# Altium PCB ExchangeDisplay2.PcbDoc (part 2 of 3)
Units mil, origin at the board's own origin, x right, y up, seen from the top; angles counter-clockwise.
Board outline 13550 x 7110 mil, 2 copper layers (Top Layer, Bottom Layer); 256 components, 104 nets, 668 pads, 97 vias.
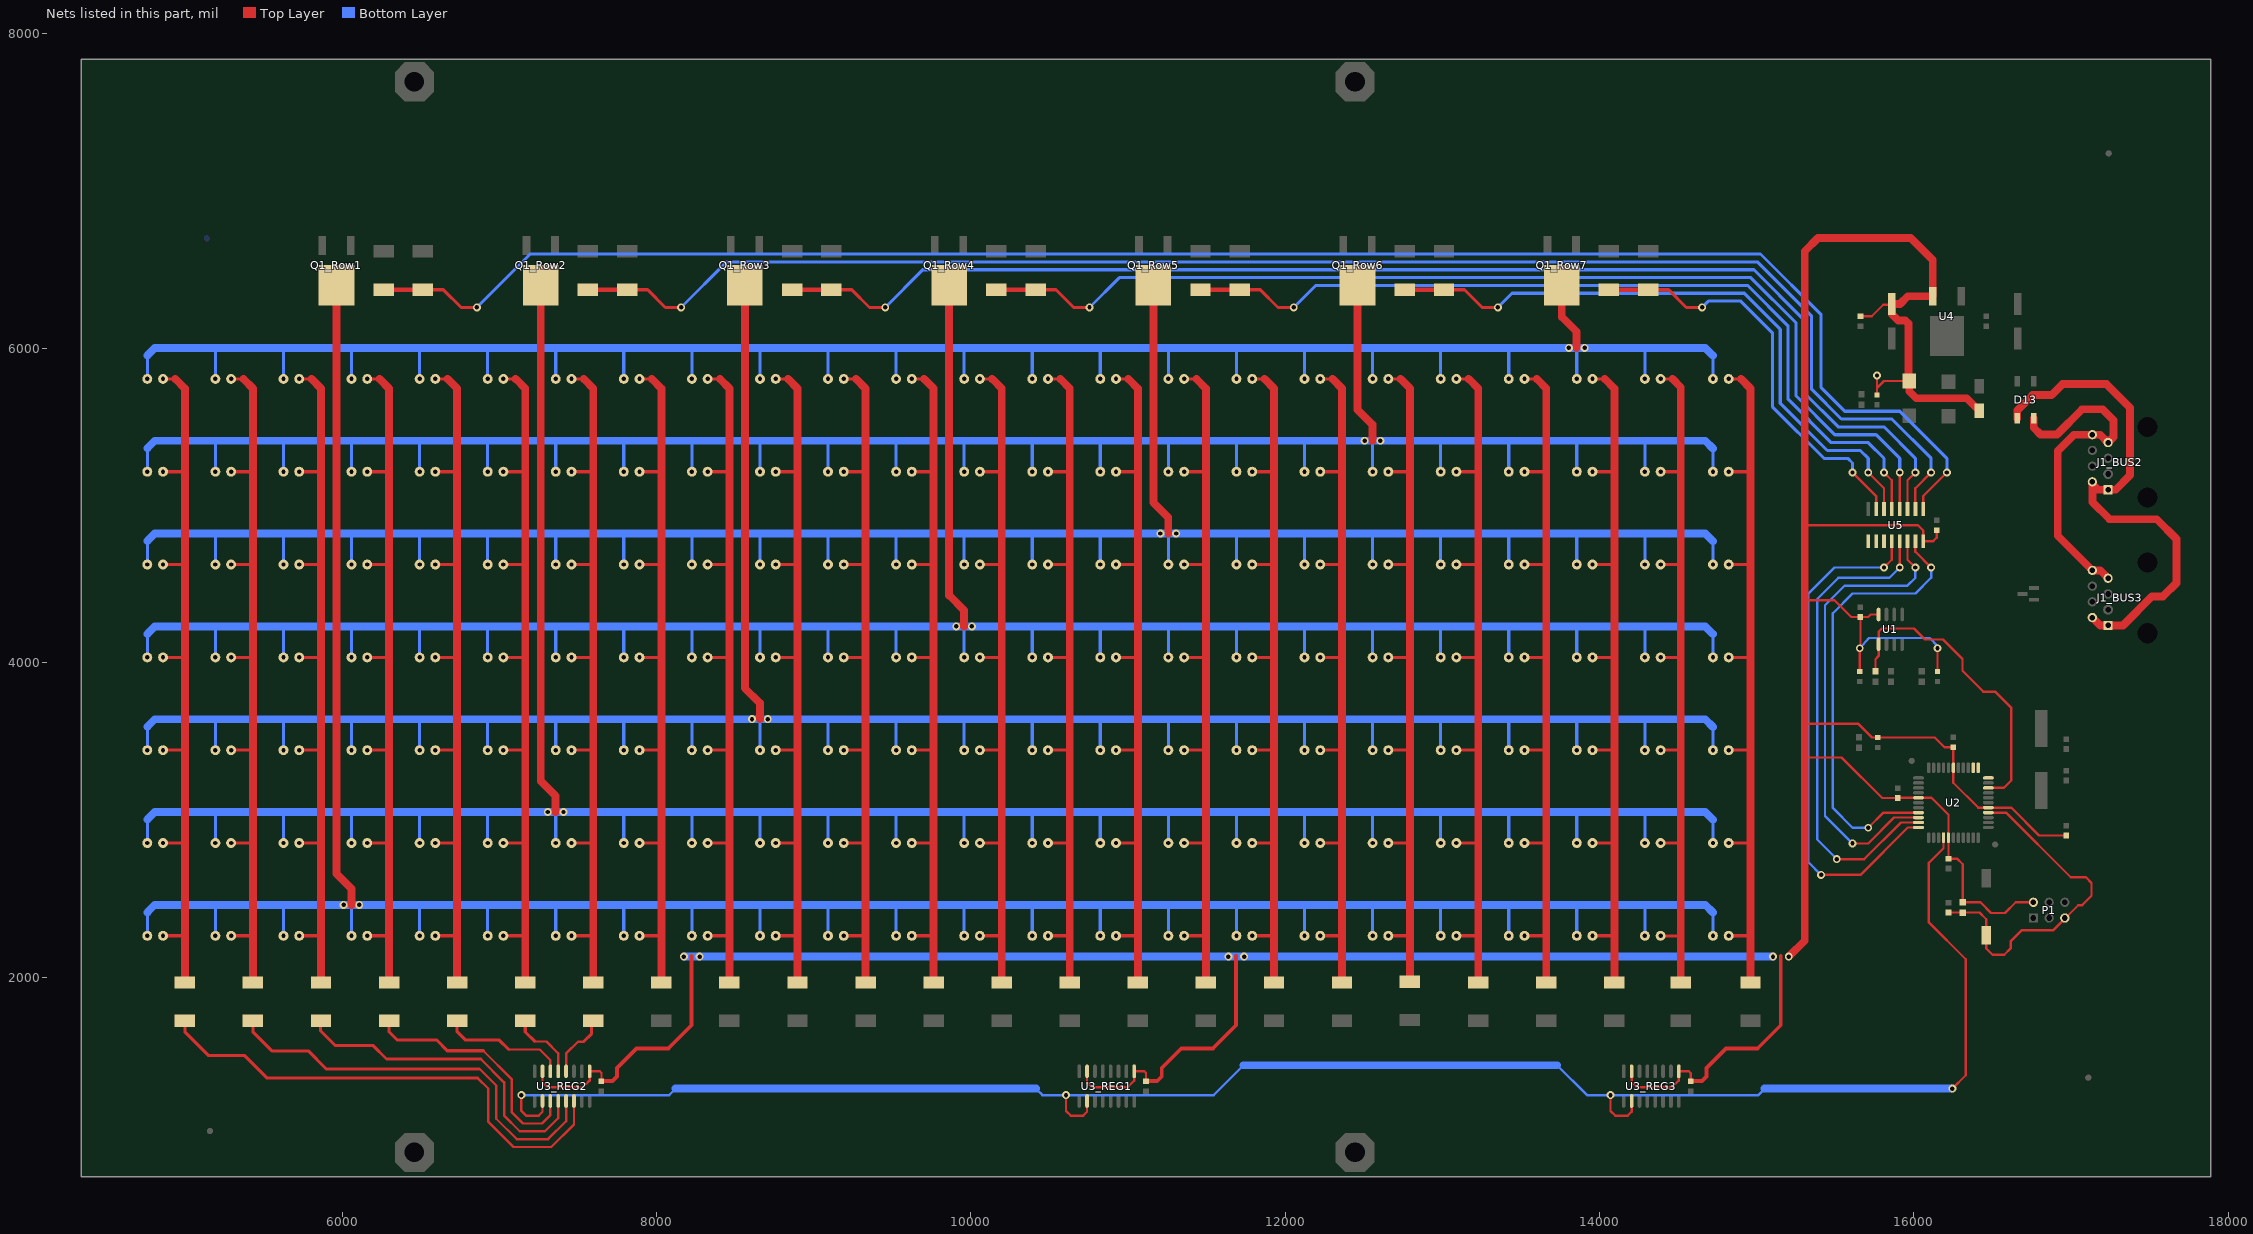
[diagram p2: the nets of this part, all layers, seen from the top]

## Via types
v1: diameter 50, hole 28, Top Layer to Bottom Layer, 96 vias
v2: diameter 50, hole 27.99, Top Layer to Bottom Layer, 1 vias

## Nets (pads, with @x,y where several pads share a name; then routed paths per layer and width w, separated by ;. In a path a pad name is that pad's centre, name@x,y a point inside that pad or via, vN(x,y) a via of type N, cw(c..) or ccw(c..) an arc to the next point about the centre after c; other vN are vias at no path point) (continued)
NetR26_2: R26.2 U3_REG2.4 | length 408.5
  Top Layer w15: U3_REG2.4@7425.47,1400.47 7425.47,1512.72 7501.34,1588.58 7538.19,1588.58
  Top Layer w20: 7538.19,1589.92 7588.27,1640 R26.2@7588.27,1721.34
NetR27_2: R27.2 U3_REG2.5 | length 451
  Top Layer w15: 7225.39,1589.45 7300.47,1589.45 7375.47,1514.45 U3_REG2.5@7375.47,1400.47
  Top Layer w20: R27.2@7165.35,1721.42 7165.35,1650.48 7225.39,1590.44
NetR28_2: R28.2 U3_REG2.6 | length 808.1
  Top Layer w15: 7061.34,1538.58 7257.87,1538.58 7325.47,1470.99 U3_REG2.6@7325.47,1400.47
  Top Layer w20: R28.2@6732.28,1721.42 6732.28,1651.03 6783.31,1600 ; 6783.31,1598.58 7001.34,1598.58 7061.34,1538.58
NetR29_2: R29.2 U3_REG2.11 | length 1572.1
  Top Layer w15: 6898.84,1531.08 7078.84,1351.08 7078.84,1141.08 7151.34,1068.58 7271.34,1068.58 7325.47,1122.72 U3_REG2.11@7325.47,1211.5
  Top Layer w20: R29.2@6299.21,1721.42 6299.21,1651.03 6350.24,1600 6600.79,1600 6669.7,1531.08 6898.84,1531.08
NetR30_2: R30.2 U3_REG2.12 | length 2113.4
  Top Layer w15: 6882.51,1478.58 7031.34,1329.75 7031.34,1118.58 7131.34,1018.58 7291.34,1018.58 7375.47,1102.72 U3_REG2.12@7375.47,1211.5
  Top Layer w20: R30.2@5864.01,1726.93 5864.01,1656.54 5955.04,1565.51 6196.14,1565.51 6283.07,1478.58 6882.51,1478.58
NetR31_2: R31.2 U3_REG2.13 | length 2644.6
  Top Layer w15: 6875.1,1415.99 6981.34,1309.75 6981.34,1098.58 7111.34,968.58 7311.34,968.58 7425.47,1082.72 U3_REG2.13@7425.47,1211.5
  Top Layer w20: R31.2@5433.07,1721.42 5433.07,1651.03 5554.09,1530 5785.75,1530 5898.35,1417.4 ; 5898.35,1415.99 6875.1,1415.99
NetR32_2: R32.2 U3_REG2.14 | length 3180.9
  Top Layer w15: 6862.59,1358.58 6931.34,1289.83 6931.34,1078.58 7091.34,918.58 7331.34,918.58 7475.47,1062.72 U3_REG2.14@7475.47,1211.5
  Top Layer w20: R32.2@5000,1721.42 5000,1651.03 5151.02,1500 5381.02,1500 5521.02,1360 ; 5521.02,1358.58 6862.59,1358.58
NetU5_9: U5.9
NetU5_10: U5.10
NetU5_11: U5.11
OUT_Row1: D5_Row1.A D6_Row1.A D7_Row1.A D8_Row1.A D9_Row1.A D10_Row1.A D11_Row1.A D17_Row1.A D18_Row1.A D19_Row1.A D20_Row1.A D21_Row1.A D22_Row1.A D23_Row1.A D24_Row1.A D25_Row1.A D26_Row1.A D27_Row1.A D28_Row1.A D29_Row1.A D30_Row1.A D31_Row1.A D32_Row1.A D33_Row1.A Q1_Row1.2 | length 18509.2
  Top Layer w50: Q1_Row1.2@5964.72,6300.51 5964.72,2656.69 6059.72,2561.69 6059.72,2459.06
  Bottom Layer w20: D33_Row1.A@4761.37,2262.21 4761.37,2411.37 ; D32_Row1.A@5194.44,2262.21 5194.44,2459.06 ; D31_Row1.A@5627.51,2262.21 5627.51,2459.06 ; D30_Row1.A@6060.58,2262.21 6060.58,2459.06 ; D29_Row1.A@6493.65,2262.21 6493.65,2459.06 ; D28_Row1.A@6926.72,2262.21 6926.72,2459.06 ; D27_Row1.A@7359.8,2262.21 7359.8,2459.06 ; D26_Row1.A@7792.87,2262.21 7792.87,2459.06 ; D25_Row1.A@8225.94,2262.21 8225.94,2459.06 ; D24_Row1.A@8659.01,2262.21 8659.01,2459.06 ; D23_Row1.A@9092.08,2262.21 9092.08,2459.06 ; D22_Row1.A@9525.15,2262.21 9525.15,2459.06 ; D21_Row1.A@9958.22,2262.21 9958.22,2459.06 ; D20_Row1.A@10391.29,2262.21 10391.29,2459.06 ; D19_Row1.A@10824.36,2262.21 10824.36,2459.06 ; D18_Row1.A@11257.43,2262.21 11257.43,2459.06 ; D17_Row1.A@11690.5,2262.21 11690.5,2459.06 ; D11_Row1.A@12123.57,2262.21 12123.57,2459.06 ; D10_Row1.A@12556.65,2262.21 12556.65,2459.06 ; D9_Row1.A@12989.72,2262.21 12989.72,2459.06 ; D8_Row1.A@13422.79,2262.21 13422.79,2459.06 ; D7_Row1.A@13855.86,2262.21 13855.86,2459.06 ; D6_Row1.A@14288.93,2262.21 14288.93,2459.06 ; D5_Row1.A@14722,2262.21 14722,2410
  Bottom Layer w50: 4761.37,2411.37 4809.06,2459.06 14672.94,2459.06 14722,2410
  other v1: 6009.83,2459.42 6109.83,2459.42
OUT_Row2: D5_Row2.A D6_Row2.A D7_Row2.A D8_Row2.A D9_Row2.A D10_Row2.A D11_Row2.A D17_Row2.A D18_Row2.A D19_Row2.A D20_Row2.A D21_Row2.A D22_Row2.A D23_Row2.A D24_Row2.A D25_Row2.A D26_Row2.A D27_Row2.A D28_Row2.A D29_Row2.A D30_Row2.A D31_Row2.A D32_Row2.A D33_Row2.A Q1_Row2.2 | length 17918.6
  Top Layer w50: Q1_Row2.2@7263.94,6300.51 7263.94,3247.24 7358.94,3152.24 7358.94,3049.61
  Bottom Layer w20: D33_Row2.A@4761.37,2852.76 4761.37,3001.92 ; D32_Row2.A@5194.44,2852.76 5194.44,3049.61 ; D31_Row2.A@5627.51,2852.76 5627.51,3049.61 ; D30_Row2.A@6060.58,2852.76 6060.58,3049.61 ; D29_Row2.A@6493.65,2852.76 6493.65,3049.61 ; D28_Row2.A@6926.72,2852.76 6926.72,3049.61 ; D27_Row2.A@7359.8,2852.76 7359.8,3049.61 ; D26_Row2.A@7792.87,2852.76 7792.87,3049.61 ; D25_Row2.A@8225.94,2852.76 8225.94,3049.61 ; D24_Row2.A@8659.01,2852.76 8659.01,3049.61 ; D23_Row2.A@9092.08,2852.76 9092.08,3049.61 ; D22_Row2.A@9525.15,2852.76 9525.15,3049.61 ; D21_Row2.A@9958.22,2852.76 9958.22,3049.61 ; D20_Row2.A@10391.29,2852.76 10391.29,3049.61 ; D19_Row2.A@10824.36,2852.76 10824.36,3049.61 ; D18_Row2.A@11257.43,2852.76 11257.43,3049.61 ; D17_Row2.A@11690.5,2852.76 11690.5,3049.61 ; D11_Row2.A@12123.57,2852.76 12123.57,3049.61 ; D10_Row2.A@12556.65,2852.76 12556.65,3049.61 ; D9_Row2.A@12989.72,2852.76 12989.72,3049.61 ; D8_Row2.A@13422.79,2852.76 13422.79,3049.61 ; D7_Row2.A@13855.86,2852.76 13855.86,3049.61 ; D6_Row2.A@14288.93,2852.76 14288.93,3049.61 ; D5_Row2.A@14722,2852.76 14722,3000.55
  Bottom Layer w50: 4761.37,3001.92 4809.06,3049.61 14672.94,3049.61 14722,3000.55
  other v1: 7309.04,3049.97 7409.04,3049.97
OUT_Row3: D5_Row3.A D6_Row3.A D7_Row3.A D8_Row3.A D9_Row3.A D10_Row3.A D11_Row3.A D17_Row3.A D18_Row3.A D19_Row3.A D20_Row3.A D21_Row3.A D22_Row3.A D23_Row3.A D24_Row3.A D25_Row3.A D26_Row3.A D27_Row3.A D28_Row3.A D29_Row3.A D30_Row3.A D31_Row3.A D32_Row3.A D33_Row3.A Q1_Row3.2 | length 17328.1
  Top Layer w50: Q1_Row3.2@8563.15,6300.51 8563.15,3837.8 8658.15,3742.8 8658.15,3640.16
  Bottom Layer w20: D33_Row3.A@4761.37,3443.31 4761.37,3592.47 ; D32_Row3.A@5194.44,3443.31 5194.44,3640.16 ; D31_Row3.A@5627.51,3443.31 5627.51,3640.16 ; D30_Row3.A@6060.58,3443.31 6060.58,3640.16 ; D29_Row3.A@6493.65,3443.31 6493.65,3640.16 ; D28_Row3.A@6926.72,3443.31 6926.72,3640.16 ; D27_Row3.A@7359.8,3443.31 7359.8,3640.16 ; D26_Row3.A@7792.87,3443.31 7792.87,3640.16 ; D25_Row3.A@8225.94,3443.31 8225.94,3640.16 ; D24_Row3.A@8659.01,3443.31 8659.01,3640.16 ; D23_Row3.A@9092.08,3443.31 9092.08,3640.16 ; D22_Row3.A@9525.15,3443.31 9525.15,3640.16 ; D21_Row3.A@9958.22,3443.31 9958.22,3640.16 ; D20_Row3.A@10391.29,3443.31 10391.29,3640.16 ; D19_Row3.A@10824.36,3443.31 10824.36,3640.16 ; D18_Row3.A@11257.43,3443.31 11257.43,3640.16 ; D17_Row3.A@11690.5,3443.31 11690.5,3640.16 ; D11_Row3.A@12123.57,3443.31 12123.57,3640.16 ; D10_Row3.A@12556.65,3443.31 12556.65,3640.16 ; D9_Row3.A@12989.72,3443.31 12989.72,3640.16 ; D8_Row3.A@13422.79,3443.31 13422.79,3640.16 ; D7_Row3.A@13855.86,3443.31 13855.86,3640.16 ; D6_Row3.A@14288.93,3443.31 14288.93,3640.16 ; D5_Row3.A@14722,3443.31 14722,3591.1
  Bottom Layer w50: 4761.37,3592.47 4809.06,3640.16 14672.94,3640.16 14722,3591.1
  other v1: 8608.25,3640.52 8708.25,3640.52
OUT_Row4: D5_Row4.A D6_Row4.A D7_Row4.A D8_Row4.A D9_Row4.A D10_Row4.A D11_Row4.A D17_Row4.A D18_Row4.A D19_Row4.A D20_Row4.A D21_Row4.A D22_Row4.A D23_Row4.A D24_Row4.A D25_Row4.A D26_Row4.A D27_Row4.A D28_Row4.A D29_Row4.A D30_Row4.A D31_Row4.A D32_Row4.A D33_Row4.A Q1_Row4.2 | length 16737.5
  Top Layer w50: Q1_Row4.2@9862.36,6300.51 9862.36,4428.35 9957.36,4333.35 9957.36,4230.71
  Bottom Layer w20: D33_Row4.A@4761.37,4033.86 4761.37,4183.02 ; D32_Row4.A@5194.44,4033.86 5194.44,4230.71 ; D31_Row4.A@5627.51,4033.86 5627.51,4230.71 ; D30_Row4.A@6060.58,4033.86 6060.58,4230.71 ; D29_Row4.A@6493.65,4033.86 6493.65,4230.71 ; D28_Row4.A@6926.72,4033.86 6926.72,4230.71 ; D27_Row4.A@7359.8,4033.86 7359.8,4230.71 ; D26_Row4.A@7792.87,4033.86 7792.87,4230.71 ; D25_Row4.A@8225.94,4033.86 8225.94,4230.71 ; D24_Row4.A@8659.01,4033.86 8659.01,4230.71 ; D23_Row4.A@9092.08,4033.86 9092.08,4230.71 ; D22_Row4.A@9525.15,4033.86 9525.15,4230.71 ; D21_Row4.A@9958.22,4033.86 9958.22,4230.71 ; D20_Row4.A@10391.29,4033.86 10391.29,4230.71 ; D19_Row4.A@10824.36,4033.86 10824.36,4230.71 ; D18_Row4.A@11257.43,4033.86 11257.43,4230.71 ; D17_Row4.A@11690.5,4033.86 11690.5,4230.71 ; D11_Row4.A@12123.57,4033.86 12123.57,4230.71 ; D10_Row4.A@12556.65,4033.86 12556.65,4230.71 ; D9_Row4.A@12989.72,4033.86 12989.72,4230.71 ; D8_Row4.A@13422.79,4033.86 13422.79,4230.71 ; D7_Row4.A@13855.86,4033.86 13855.86,4230.71 ; D6_Row4.A@14288.93,4033.86 14288.93,4230.71 ; D5_Row4.A@14722,4033.86 14722,4181.65
  Bottom Layer w50: 4761.37,4183.02 4809.06,4230.71 14672.94,4230.71 14722,4181.65
  other v1: 9907.46,4231.07 10007.46,4231.07
OUT_Row5: D5_Row5.A D6_Row5.A D7_Row5.A D8_Row5.A D9_Row5.A D10_Row5.A D11_Row5.A D17_Row5.A D18_Row5.A D19_Row5.A D20_Row5.A D21_Row5.A D22_Row5.A D23_Row5.A D24_Row5.A D25_Row5.A D26_Row5.A D27_Row5.A D28_Row5.A D29_Row5.A D30_Row5.A D31_Row5.A D32_Row5.A D33_Row5.A Q1_Row5.2 | length 16147
  Top Layer w50: Q1_Row5.2@11161.57,6300.51 11161.57,5018.9 11256.57,4923.9 11256.57,4821.26
  Bottom Layer w20: D33_Row5.A@4761.37,4624.41 4761.37,4773.57 ; D32_Row5.A@5194.44,4624.41 5194.44,4821.26 ; D31_Row5.A@5627.51,4624.41 5627.51,4821.26 ; D30_Row5.A@6060.58,4624.41 6060.58,4821.26 ; D29_Row5.A@6493.65,4624.41 6493.65,4821.26 ; D28_Row5.A@6926.72,4624.41 6926.72,4821.26 ; D27_Row5.A@7359.8,4624.41 7359.8,4821.26 ; D26_Row5.A@7792.87,4624.41 7792.87,4821.26 ; D25_Row5.A@8225.94,4624.41 8225.94,4821.26 ; D24_Row5.A@8659.01,4624.41 8659.01,4821.26 ; D23_Row5.A@9092.08,4624.41 9092.08,4821.26 ; D22_Row5.A@9525.15,4624.41 9525.15,4821.26 ; D21_Row5.A@9958.22,4624.41 9958.22,4821.26 ; D20_Row5.A@10391.29,4624.41 10391.29,4821.26 ; D19_Row5.A@10824.36,4624.41 10824.36,4821.26 ; D18_Row5.A@11257.43,4624.41 11257.43,4821.26 ; D17_Row5.A@11690.5,4624.41 11690.5,4821.26 ; D11_Row5.A@12123.57,4624.41 12123.57,4821.26 ; D10_Row5.A@12556.65,4624.41 12556.65,4821.26 ; D9_Row5.A@12989.72,4624.41 12989.72,4821.26 ; D8_Row5.A@13422.79,4624.41 13422.79,4821.26 ; D7_Row5.A@13855.86,4624.41 13855.86,4821.26 ; D6_Row5.A@14288.93,4624.41 14288.93,4821.26 ; D5_Row5.A@14722,4624.41 14722,4772.2
  Bottom Layer w50: 4761.37,4773.57 4809.06,4821.26 14672.94,4821.26 14722,4772.2
  other v1: 11206.68,4821.62 11306.68,4821.62
OUT_Row6: D5_Row6.A D6_Row6.A D7_Row6.A D8_Row6.A D9_Row6.A D10_Row6.A D11_Row6.A D17_Row6.A D18_Row6.A D19_Row6.A D20_Row6.A D21_Row6.A D22_Row6.A D23_Row6.A D24_Row6.A D25_Row6.A D26_Row6.A D27_Row6.A D28_Row6.A D29_Row6.A D30_Row6.A D31_Row6.A D32_Row6.A D33_Row6.A Q1_Row6.2 | length 15556.4
  Top Layer w50: Q1_Row6.2@12460.79,6300.51 12460.79,5609.45 12555.79,5514.45 12555.79,5411.81
  Bottom Layer w20: D33_Row6.A@4761.37,5214.96 4761.37,5364.13 ; D32_Row6.A@5194.44,5214.96 5194.44,5411.81 ; D31_Row6.A@5627.51,5214.96 5627.51,5411.81 ; D30_Row6.A@6060.58,5214.96 6060.58,5411.81 ; D29_Row6.A@6493.65,5214.96 6493.65,5411.81 ; D28_Row6.A@6926.72,5214.96 6926.72,5411.81 ; D27_Row6.A@7359.8,5214.96 7359.79,5411.81 ; D26_Row6.A@7792.87,5214.96 7792.87,5411.81 ; D25_Row6.A@8225.94,5214.96 8225.94,5411.81 ; D24_Row6.A@8659.01,5214.96 8659.01,5411.81 ; D23_Row6.A@9092.08,5214.96 9092.08,5411.81 ; D22_Row6.A@9525.15,5214.96 9525.15,5411.81 ; D21_Row6.A@9958.22,5214.96 9958.22,5411.81 ; D20_Row6.A@10391.29,5214.96 10391.29,5411.81 ; D19_Row6.A@10824.36,5214.96 10824.36,5411.81 ; D18_Row6.A@11257.43,5214.96 11257.43,5411.81 ; D17_Row6.A@11690.5,5214.96 11690.5,5411.81 ; D11_Row6.A@12123.57,5214.96 12123.57,5411.81 ; D10_Row6.A@12556.65,5214.96 12556.65,5411.81 ; D9_Row6.A@12989.72,5214.96 12989.72,5411.81 ; D8_Row6.A@13422.8,5214.96 13422.79,5411.81 ; D7_Row6.A@13855.86,5214.96 13855.86,5411.81 ; D6_Row6.A@14288.93,5214.96 14288.93,5411.81 ; D5_Row6.A@14722.01,5214.96 14722,5362.76
  Bottom Layer w50: 4761.37,5364.13 4809.06,5411.81 14672.94,5411.81 14722,5362.76
  other v1: 12505.89,5412.17 12605.89,5412.17
OUT_Row7: D5_Row7.A D6_Row7.A D7_Row7.A D8_Row7.A D9_Row7.A D10_Row7.A D11_Row7.A D17_Row7.A D18_Row7.A D19_Row7.A D20_Row7.A D21_Row7.A D22_Row7.A D23_Row7.A D24_Row7.A D25_Row7.A D26_Row7.A D27_Row7.A D28_Row7.A D29_Row7.A D30_Row7.A D31_Row7.A D32_Row7.A D33_Row7.A Q1_Row7.2 | length 14965.9
  Top Layer w50: Q1_Row7.2@13760,6300.51 13760,6200 13855,6105 13855,6002.36
  Bottom Layer w20: D33_Row7.A@4761.37,5805.51 4761.37,5954.68 ; D32_Row7.A@5194.44,5805.51 5194.44,6002.36 ; D31_Row7.A@5627.51,5805.51 5627.51,6002.36 ; D30_Row7.A@6060.58,5805.51 6060.58,6002.36 ; D29_Row7.A@6493.65,5805.51 6493.65,6002.36 ; D28_Row7.A@6926.72,5805.51 6926.72,6002.36 ; D27_Row7.A@7359.8,5805.51 7359.8,6002.36 ; D26_Row7.A@7792.87,5805.51 7792.87,6002.36 ; D25_Row7.A@8225.94,5805.51 8225.94,6002.36 ; D24_Row7.A@8659.01,5805.51 8659.01,6002.36 ; D23_Row7.A@9092.08,5805.51 9092.08,6002.36 ; D22_Row7.A@9525.15,5805.51 9525.15,6002.36 ; D21_Row7.A@9958.22,5805.51 9958.22,6002.36 ; D20_Row7.A@10391.29,5805.51 10391.29,6002.36 ; D19_Row7.A@10824.36,5805.51 10824.36,6002.36 ; D18_Row7.A@11257.43,5805.51 11257.43,6002.36 ; D17_Row7.A@11690.5,5805.51 11690.5,6002.36 ; D11_Row7.A@12123.57,5805.51 12123.57,6002.36 ; D10_Row7.A@12556.65,5805.51 12556.65,6002.36 ; D9_Row7.A@12989.72,5805.51 12989.72,6002.36 ; D8_Row7.A@13422.79,5805.51 13422.79,6002.36 ; D7_Row7.A@13855.86,5805.51 13855.86,6002.36 ; D6_Row7.A@14288.93,5805.51 14288.93,6002.36 ; D5_Row7.A@14722.01,5805.51 14722,5953.31
  Bottom Layer w50: 4761.37,5954.68 4809.06,6002.36 14672.94,6002.36 14722,5953.31
  other v1: 13805.1,6002.73 13905.1,6002.73
PIN_A: U2.30 U5.15 | length 2868.2
  Top Layer w15: v1(15710,2950) 15806.1,3046.1 U2.30@16029.37,3046.1 ; U5.15@16010,4772.64 16010,4705.28 v1(16110,4605.28)
  Bottom Layer w15: v1(15710,2950) 15610,2950 15485,3075 15485,4315 15610,4440 16010,4440 16110,4540 v1(16110,4605.28)
PIN_B: U2.31 U5.14 | length 2975.9
  Top Layer w15: v1(15610,2850) 15710,2850 15874.61,3014.61 U2.31@16029.37,3014.61 ; U5.14@15960,4772.64 15960,4655.28 v1(16010,4605.28)
  Bottom Layer w15: v1(15610,2850) 15435,3025 15435,4365 15560,4490 15960,4490 16010,4540 v1(16010,4605.28)
PIN_C: U2.32 U5.13 | length 3098
  Top Layer w15: v1(15510,2750) 15685,2750 15918.11,2983.11 U2.32@16029.37,2983.11 ; v1(15910,4605.28) U5.13@15910,4772.64
  Bottom Layer w15: v1(15510,2750) 15385,2875 15385,4405 15520,4540 15844.72,4540 v1(15910,4605.28)
PIN_D: U2.33 U5.12 | length 3304
  Top Layer w15: v1(15410,2650) 15660,2650 15961.61,2951.61 U2.33@16029.37,2951.62 ; v1(15810,4605.28) 15860,4655.28 U5.12@15860,4772.64
  Bottom Layer w15: v1(15410,2650) 15330,2730 15330,4440 15495.28,4605.28 v1(15810,4605.28)
POWER_V+: D13.1 J1_BUS2.1 J1_BUS2.2 J1_BUS3.1 J1_BUS3.2 | length 3331
  Top Layer w50: D13.1@16658.15,5553.94 16658.15,5604.49 16755.71,5702.05 16875.71,5702.05 16945.71,5772.05 17225.71,5772.05 17375.71,5622.05 17375.71,5192.05 17284.09,5100.43 17172.32,5100.43 J1_BUS2.2@17135.75,5137.01 ; J1_BUS3.2@17135.71,4287.05 17185.71,4237.05 17330.71,4237.05 17515.71,4422.05 17585.71,4422.05 17670.71,4507.05 17670.71,4787.05 17545.71,4912.05 17245.71,4912.05 17135.75,5022.01 J1_BUS2.2@17135.75,5150.43
POWER_V-: D13.2 J1_BUS2.7 J1_BUS2.8 J1_BUS3.7 J1_BUS3.8 | length 2192.5
  Top Layer w50: D13.2@16763.27,5553.94 16763.27,5494.49 16805.71,5452.05 16910.71,5452.05 17070.71,5612.05 17200.71,5612.05 17270.71,5542.05 17270.71,5435.4 J1_BUS2.7@17235.75,5400.43 17185.75,5450.43 17019.09,5450.43 16915.71,5347.05 16915.71,4807.09 J1_BUS3.8@17135.71,4587.05 17185.71,4587.05 J1_BUS3.7@17233.21,4539.55 ; J1_BUS2.8@17135.75,5450.43 J1_BUS2.8@17139.13,5447.05
RCK: U2.37 U3_REG1.10 U3_REG2.10 U3_REG3.10 | length 12044.5
  Top Layer w15: v1(7141.34,1248.58) 7141.34,1148.58 7171.34,1118.58 7251.34,1118.58 7275.47,1142.72 U3_REG2.10@7275.47,1211.5 ; v1(10605.91,1248.58) 10605.91,1148.58 10635.91,1118.58 10715.91,1118.58 10740.04,1142.72 U3_REG1.10@10740.04,1211.5 ; v1(14070.47,1248.58) 14070.47,1148.58 14100.47,1118.58 14180.47,1118.58 14204.61,1142.72 U3_REG3.10@14204.61,1211.5 ; U2.37@16188.42,2886.26 16188.42,2819.76 16095.71,2727.05 16095.71,2347.05 16330,2112.76 16330,1375 v1(16245,1290)
  Bottom Layer w15: v1(7141.34,1248.58) 8082.27,1248.58 ; 8081.8,1249.05 8121.34,1288.58 ; 10415.91,1288.58 10455.91,1248.58 11546.84,1248.58 ; 11546.37,1249.05 11735.91,1438.58 ; 13730.47,1438.58 13920.47,1248.58 15011.4,1248.58 ; 15010.94,1249.05 15050.47,1288.58
  Bottom Layer w50: 8121.34,1290 10415.91,1290 ; 11735.91,1438.58 13730.47,1438.58 ; 15050.47,1290 v1@16235,1290
RES01: D5_Row1.K D5_Row2.K D5_Row3.K D5_Row4.K D5_Row5.K D5_Row6.K D5_Row7.K R9.1 | length 4774.9
  Top Layer w20: D5_Row1.K@14822,2262.21 14960.63,2262.21 ; D5_Row2.K@14822,2852.76 14960.63,2852.76 ; D5_Row3.K@14822,3443.31 14960.63,3443.31 ; D5_Row4.K@14822,4033.86 14960.63,4033.86 ; D5_Row5.K@14822,4624.41 14960.63,4624.41 ; D5_Row6.K@14822.01,5214.96 14960.63,5214.96 ; D5_Row7.K@14822.01,5805.51 14900,5805.51
  Top Layer w50: 14900,5805.51 14960.63,5744.88 ; R9.1@14960,1960.63 14960,5740
RES02: D6_Row1.K D6_Row2.K D6_Row3.K D6_Row4.K D6_Row5.K D6_Row6.K D6_Row7.K R11.1 | length 4708.4
  Top Layer w20: D6_Row1.K@14388.93,2262.21 14517.4,2262.13 ; D6_Row2.K@14388.93,2852.76 14517.4,2852.68 ; D6_Row3.K@14388.93,3443.31 14517.4,3443.23 ; D6_Row4.K@14388.93,4033.78 14517.4,4033.78 ; D6_Row5.K@14388.93,4624.41 14517.4,4624.33 ; D6_Row6.K@14388.93,5214.88 14517.4,5214.88 ; D6_Row7.K@14388.93,5805.43 14464.57,5805.43
  Top Layer w50: 14464.57,5805.43 14517.4,5752.6 R11.1@14517.4,1965.43
RES03: D7_Row1.K D7_Row2.K D7_Row3.K D7_Row4.K D7_Row5.K D7_Row6.K D7_Row7.K R13.1 | length 4774.9
  Top Layer w20: D7_Row1.K@13955.86,2262.21 14094.49,2262.21 ; D7_Row2.K@13955.86,2852.76 14094.49,2852.76 ; D7_Row3.K@13955.86,3443.31 14094.49,3443.31 ; D7_Row4.K@13955.86,4033.86 14094.49,4033.86 ; D7_Row5.K@13955.86,4624.41 14094.49,4624.41 ; D7_Row6.K@13955.86,5214.96 14094.49,5214.96 ; D7_Row7.K@13955.86,5805.51 14033.86,5805.51
  Top Layer w50: 14033.86,5805.51 14094.49,5744.88 R13.1@14094.49,1965.51
RES04: D8_Row1.K D8_Row2.K D8_Row3.K D8_Row4.K D8_Row5.K D8_Row6.K D8_Row7.K R15.1 | length 4774.9
  Top Layer w20: D8_Row1.K@13522.79,2262.21 13661.42,2262.21 ; D8_Row2.K@13522.79,2852.76 13661.42,2852.76 ; D8_Row3.K@13522.79,3443.31 13661.42,3443.31 ; D8_Row4.K@13522.79,4033.86 13661.42,4033.86 ; D8_Row5.K@13522.79,4624.41 13661.42,4624.41 ; D8_Row6.K@13522.8,5214.96 13661.42,5214.96 ; D8_Row7.K@13522.79,5805.51 13600.79,5805.51
  Top Layer w50: 13600.79,5805.51 13661.42,5744.88 R15.1@13661.42,1965.51
RES05: D9_Row1.K D9_Row2.K D9_Row3.K D9_Row4.K D9_Row5.K D9_Row6.K D9_Row7.K R17.1 | length 4774.9
  Top Layer w20: D9_Row1.K@13089.72,2262.21 13228.34,2262.21 ; D9_Row2.K@13089.72,2852.76 13228.35,2852.76 ; D9_Row3.K@13089.72,3443.31 13228.35,3443.31 ; D9_Row4.K@13089.72,4033.86 13228.35,4033.86 ; D9_Row5.K@13089.72,4624.41 13228.35,4624.41 ; D9_Row6.K@13089.72,5214.96 13228.35,5214.96 ; D9_Row7.K@13089.72,5805.51 13167.72,5805.51
  Top Layer w50: 13167.72,5805.51 13228.35,5744.88 R17.1@13228.35,1965.51
RES06: D10_Row1.K D10_Row2.K D10_Row3.K D10_Row4.K D10_Row5.K D10_Row6.K D10_Row7.K R19.1 | length 4774.9
  Top Layer w20: D10_Row1.K@12656.65,2262.21 12795.27,2262.21 ; D10_Row2.K@12656.65,2852.76 12795.27,2852.76 ; D10_Row3.K@12656.65,3443.31 12795.27,3443.31 ; D10_Row4.K@12656.65,4033.86 12795.27,4033.86 ; D10_Row5.K@12656.65,4624.41 12795.27,4624.41 ; D10_Row6.K@12656.65,5214.96 12795.27,5214.96 ; D10_Row7.K@12656.65,5805.51 12734.65,5805.51
  Top Layer w50: 12734.65,5805.51 12795.27,5744.88 R19.1@12795.27,1965.51
RES07: D11_Row1.K D11_Row2.K D11_Row3.K D11_Row4.K D11_Row5.K D11_Row6.K D11_Row7.K R21.1 | length 4774.9
  Top Layer w20: D11_Row1.K@12223.57,2262.21 12362.2,2262.21 ; D11_Row2.K@12223.57,2852.76 12362.2,2852.76 ; D11_Row3.K@12223.57,3443.31 12362.2,3443.31 ; D11_Row4.K@12223.57,4033.86 12362.2,4033.86 ; D11_Row5.K@12223.57,4624.41 12362.2,4624.41 ; D11_Row6.K@12223.57,5214.96 12362.2,5214.96 ; D11_Row7.K@12223.57,5805.51 12301.57,5805.51
  Top Layer w50: 12301.57,5805.51 12362.2,5744.88 R21.1@12362.2,1965.51
RES08: D17_Row1.K D17_Row2.K D17_Row3.K D17_Row4.K D17_Row5.K D17_Row6.K D17_Row7.K R23.1 | length 4774.9
  Top Layer w20: D17_Row1.K@11790.5,2262.21 11929.13,2262.21 ; D17_Row2.K@11790.5,2852.76 11929.13,2852.76 ; D17_Row3.K@11790.5,3443.31 11929.13,3443.31 ; D17_Row4.K@11790.5,4033.86 11929.13,4033.86 ; D17_Row5.K@11790.5,4624.41 11929.13,4624.41 ; D17_Row6.K@11790.5,5214.96 11929.13,5214.96 ; D17_Row7.K@11790.5,5805.51 11868.5,5805.51
  Top Layer w50: 11868.5,5805.51 11929.13,5744.88 R23.1@11929.13,1965.51
RES11: D26_Row1.K D26_Row2.K D26_Row3.K D26_Row4.K D26_Row5.K D26_Row6.K D26_Row7.K R25.1 | length 4774.9
  Top Layer w20: D26_Row1.K@7892.87,2262.21 8031.49,2262.21 ; D26_Row2.K@7892.87,2852.76 8031.49,2852.76 ; D26_Row3.K@7892.87,3443.31 8031.49,3443.31 ; D26_Row4.K@7892.87,4033.86 8031.49,4033.86 ; D26_Row5.K@7892.87,4624.41 8031.49,4624.41 ; D26_Row6.K@7892.87,5214.96 8031.49,5214.96 ; D26_Row7.K@7892.87,5805.51 7970.87,5805.51
  Top Layer w50: 7970.87,5805.51 8031.5,5744.88 R25.1@8031.5,1965.51
RES12: D27_Row1.K D27_Row2.K D27_Row3.K D27_Row4.K D27_Row5.K D27_Row6.K D27_Row7.K R26.1 | length 4774.9
  Top Layer w20: D27_Row1.K@7459.8,2262.21 7598.42,2262.21 ; D27_Row2.K@7459.8,2852.76 7598.42,2852.76 ; D27_Row3.K@7459.8,3443.31 7598.42,3443.31 ; D27_Row4.K@7459.8,4033.86 7598.42,4033.86 ; D27_Row5.K@7459.8,4624.41 7598.42,4624.41 ; D27_Row6.K@7459.8,5214.96 7598.42,5214.96 ; D27_Row7.K@7459.8,5805.51 7537.79,5805.51
  Top Layer w50: 7537.79,5805.51 7598.42,5744.88 R26.1@7598.42,1965.51
RES13: D28_Row1.K D28_Row2.K D28_Row3.K D28_Row4.K D28_Row5.K D28_Row6.K D28_Row7.K R27.1 | length 4774.9
  Top Layer w20: D28_Row1.K@7026.72,2262.21 7165.35,2262.21 ; D28_Row2.K@7026.72,2852.76 7165.35,2852.76 ; D28_Row3.K@7026.72,3443.31 7165.35,3443.31 ; D28_Row4.K@7026.72,4033.86 7165.35,4033.86 ; D28_Row5.K@7026.72,4624.41 7165.35,4624.41 ; D28_Row6.K@7026.72,5214.96 7165.35,5214.96 ; D28_Row7.K@7026.72,5805.51 7104.72,5805.51
  Top Layer w50: 7104.72,5805.51 7165.35,5744.88 R27.1@7165.35,1965.51
RES14: D29_Row1.K D29_Row2.K D29_Row3.K D29_Row4.K D29_Row5.K D29_Row6.K D29_Row7.K R28.1 | length 4774.9
  Top Layer w20: D29_Row1.K@6593.65,2262.21 6732.28,2262.21 ; D29_Row2.K@6593.65,2852.76 6732.28,2852.76 ; D29_Row3.K@6593.65,3443.31 6732.28,3443.31 ; D29_Row4.K@6593.65,4033.86 6732.28,4033.86 ; D29_Row5.K@6593.65,4624.41 6732.28,4624.41 ; D29_Row6.K@6593.65,5214.96 6732.28,5214.96 ; D29_Row7.K@6593.65,5805.51 6671.65,5805.51
  Top Layer w50: 6671.65,5805.51 6732.28,5744.88 R28.1@6732.28,1965.51
RES15: D30_Row1.K D30_Row2.K D30_Row3.K D30_Row4.K D30_Row5.K D30_Row6.K D30_Row7.K R29.1 | length 4774.9
  Top Layer w20: D30_Row1.K@6160.58,2262.21 6299.21,2262.21 ; D30_Row2.K@6160.58,2852.76 6299.21,2852.76 ; D30_Row3.K@6160.58,3443.31 6299.21,3443.31 ; D30_Row4.K@6160.58,4033.86 6299.21,4033.86 ; D30_Row5.K@6160.58,4624.41 6299.21,4624.41 ; D30_Row6.K@6160.58,5214.96 6299.21,5214.96 ; D30_Row7.K@6160.58,5805.51 6238.58,5805.51
  Top Layer w50: 6238.58,5805.51 6299.21,5744.88 R29.1@6299.21,1965.51
RES16: D31_Row1.K D31_Row2.K D31_Row3.K D31_Row4.K D31_Row5.K D31_Row6.K D31_Row7.K R30.1 | length 4774.9
  Top Layer w20: D31_Row1.K@5727.51,2262.21 5866.14,2262.21 ; D31_Row2.K@5727.51,2852.76 5866.14,2852.76 ; D31_Row3.K@5727.51,3443.31 5866.14,3443.31 ; D31_Row4.K@5727.51,4033.86 5866.14,4033.86 ; D31_Row5.K@5727.51,4624.41 5866.14,4624.41 ; D31_Row6.K@5727.51,5214.96 5866.14,5214.96 ; D31_Row7.K@5727.51,5805.51 5805.51,5805.51
  Top Layer w50: 5805.51,5805.51 5866.14,5744.88 R30.1@5866.14,1965.51
RES17: D32_Row1.K D32_Row2.K D32_Row3.K D32_Row4.K D32_Row5.K D32_Row6.K D32_Row7.K R31.1 | length 4774.9
  Top Layer w20: D32_Row1.K@5294.44,2262.21 5433.07,2262.21 ; D32_Row2.K@5294.44,2852.76 5433.07,2852.76 ; D32_Row3.K@5294.44,3443.31 5433.07,3443.31 ; D32_Row4.K@5294.44,4033.86 5433.07,4033.86 ; D32_Row5.K@5294.44,4624.41 5433.07,4624.41 ; D32_Row6.K@5294.44,5214.96 5433.07,5214.96 ; D32_Row7.K@5294.44,5805.51 5372.44,5805.51
  Top Layer w50: 5372.44,5805.51 5433.07,5744.88 R31.1@5433.07,1965.51
RES18: D33_Row1.K D33_Row2.K D33_Row3.K D33_Row4.K D33_Row5.K D33_Row6.K D33_Row7.K R32.1 | length 4774.9
  Top Layer w20: D33_Row1.K@4861.37,2262.21 5000,2262.21 ; D33_Row2.K@4861.37,2852.76 5000,2852.76 ; D33_Row3.K@4861.37,3443.31 5000,3443.31 ; D33_Row4.K@4861.37,4033.86 5000,4033.86 ; D33_Row5.K@4861.37,4624.41 5000,4624.41 ; D33_Row6.K@4861.37,5214.96 5000,5214.96 ; D33_Row7.K@4861.37,5805.51 4939.37,5805.51
  Top Layer w50: 4939.37,5805.51 5000,5744.88 R32.1@5000,1965.51
RES21: D18_Row1.K D18_Row2.K D18_Row3.K D18_Row4.K D18_Row5.K D18_Row6.K D18_Row7.K R10.1 | length 4774.9
  Top Layer w20: D18_Row1.K@11357.43,2262.21 11496.06,2262.21 ; D18_Row2.K@11357.43,2852.76 11496.06,2852.76 ; D18_Row3.K@11357.43,3443.31 11496.06,3443.31 ; D18_Row4.K@11357.43,4033.86 11496.06,4033.86 ; D18_Row5.K@11357.43,4624.41 11496.06,4624.41 ; D18_Row6.K@11357.43,5214.96 11496.06,5214.96 ; D18_Row7.K@11357.43,5805.51 11435.43,5805.51
  Top Layer w50: 11435.43,5805.51 11496.06,5744.88 R10.1@11496.06,1965.51
RES22: D19_Row1.K D19_Row2.K D19_Row3.K D19_Row4.K D19_Row5.K D19_Row6.K D19_Row7.K R12.1 | length 4774.9
  Top Layer w20: D19_Row1.K@10924.36,2262.21 11062.99,2262.21 ; D19_Row2.K@10924.36,2852.76 11062.99,2852.76 ; D19_Row3.K@10924.36,3443.31 11062.99,3443.31 ; D19_Row4.K@10924.36,4033.86 11062.99,4033.86 ; D19_Row5.K@10924.36,4624.41 11062.99,4624.41 ; D19_Row6.K@10924.36,5214.96 11062.99,5214.96 ; D19_Row7.K@10924.36,5805.51 11002.36,5805.51
  Top Layer w50: 11002.36,5805.51 11062.99,5744.88 R12.1@11062.99,1965.51
RES23: D20_Row1.K D20_Row2.K D20_Row3.K D20_Row4.K D20_Row5.K D20_Row6.K D20_Row7.K R14.1 | length 4774.9
  Top Layer w20: D20_Row1.K@10491.29,2262.21 10629.92,2262.21 ; D20_Row2.K@10491.29,2852.76 10629.92,2852.76 ; D20_Row3.K@10491.29,3443.31 10629.92,3443.31 ; D20_Row4.K@10491.29,4033.86 10629.92,4033.86 ; D20_Row5.K@10491.29,4624.41 10629.92,4624.41 ; D20_Row6.K@10491.29,5214.96 10629.92,5214.96 ; D20_Row7.K@10491.29,5805.51 10569.29,5805.51
  Top Layer w50: 10569.29,5805.51 10629.92,5744.88 R14.1@10629.92,1965.51
RES24: D21_Row1.K D21_Row2.K D21_Row3.K D21_Row4.K D21_Row5.K D21_Row6.K D21_Row7.K R16.1 | length 4774.9
  Top Layer w20: D21_Row1.K@10058.22,2262.21 10196.85,2262.21 ; D21_Row2.K@10058.22,2852.76 10196.85,2852.76 ; D21_Row3.K@10058.22,3443.31 10196.85,3443.31 ; D21_Row4.K@10058.22,4033.86 10196.85,4033.86 ; D21_Row5.K@10058.22,4624.41 10196.85,4624.41 ; D21_Row6.K@10058.22,5214.96 10196.85,5214.96 ; D21_Row7.K@10058.22,5805.51 10136.22,5805.51
  Top Layer w50: 10136.22,5805.51 10196.85,5744.88 R16.1@10196.85,1965.51
RES25: D22_Row1.K D22_Row2.K D22_Row3.K D22_Row4.K D22_Row5.K D22_Row6.K D22_Row7.K R18.1 | length 4774.9
  Top Layer w20: D22_Row1.K@9625.15,2262.21 9763.78,2262.21 ; D22_Row2.K@9625.15,2852.76 9763.78,2852.76 ; D22_Row3.K@9625.15,3443.31 9763.78,3443.31 ; D22_Row4.K@9625.15,4033.86 9763.78,4033.86 ; D22_Row5.K@9625.15,4624.41 9763.78,4624.41 ; D22_Row6.K@9625.15,5214.96 9763.78,5214.96 ; D22_Row7.K@9625.15,5805.51 9703.15,5805.51
  Top Layer w50: 9703.15,5805.51 9763.78,5744.88 R18.1@9763.78,1965.51
RES26: D23_Row1.K D23_Row2.K D23_Row3.K D23_Row4.K D23_Row5.K D23_Row6.K D23_Row7.K R20.1 | length 4774.9
  Top Layer w20: D23_Row1.K@9192.08,2262.21 9330.71,2262.21 ; D23_Row2.K@9192.08,2852.76 9330.71,2852.76 ; D23_Row3.K@9192.08,3443.31 9330.71,3443.31 ; D23_Row4.K@9192.08,4033.86 9330.71,4033.86 ; D23_Row5.K@9192.08,4624.41 9330.71,4624.41 ; D23_Row6.K@9192.08,5214.96 9330.71,5214.96 ; D23_Row7.K@9192.08,5805.51 9270.08,5805.51
  Top Layer w50: 9270.08,5805.51 9330.71,5744.88 R20.1@9330.71,1965.51
RES27: D24_Row1.K D24_Row2.K D24_Row3.K D24_Row4.K D24_Row5.K D24_Row6.K D24_Row7.K R22.1 | length 4774.9
  Top Layer w20: D24_Row1.K@8759.01,2262.21 8897.64,2262.21 ; D24_Row2.K@8759.01,2852.76 8897.64,2852.76 ; D24_Row3.K@8759.01,3443.31 8897.64,3443.31 ; D24_Row4.K@8759.01,4033.86 8897.64,4033.86 ; D24_Row5.K@8759.01,4624.41 8897.64,4624.41 ; D24_Row6.K@8759.01,5214.96 8897.64,5214.96 ; D24_Row7.K@8759.01,5805.51 8837.01,5805.51
  Top Layer w50: 8837.01,5805.51 8897.64,5744.88 R22.1@8897.64,1965.51
RES28: D25_Row1.K D25_Row2.K D25_Row3.K D25_Row4.K D25_Row5.K D25_Row6.K D25_Row7.K R24.1 | length 4774.9
  Top Layer w20: D25_Row1.K@8325.94,2262.21 8464.57,2262.21 ; D25_Row2.K@8325.94,2852.76 8464.57,2852.76 ; D25_Row3.K@8325.94,3443.31 8464.57,3443.31 ; D25_Row4.K@8325.94,4033.86 8464.57,4033.86 ; D25_Row5.K@8325.94,4624.41 8464.57,4624.41 ; D25_Row6.K@8325.94,5214.96 8464.57,5214.96 ; D25_Row7.K@8325.94,5805.51 8403.94,5805.51
  Top Layer w50: 8403.94,5805.51 8464.57,5744.88 R24.1@8464.57,1965.51
RO: R2.2 U1.1 U2.9 | length 1992.7
  Top Layer w15: R2.2@15755.71,3945.51 15755.71,4022.05 15775.71,4042.05 15775.71,4197.05 15795.71,4217.05 16000.71,4217.05 16070.71,4147.05 16185.71,4147.05 16309.46,4023.3 16309.46,3948.3 16441.96,3815.8 16516.96,3815.8 16620.71,3712.05 16620.71,3252.05 16572.24,3203.58 U2.9@16474.25,3203.58
ROW0: R6_Row1.2 R7_Row1.1 U5.1 | length 11328.1
  Top Layer w15: U5.1@16060,4977.36 16060,5060 v1(16210,5210)
  Top Layer w20: R6_Row1.2@6514.72,6372.95 6644.87,6372.95 6757.83,6260 v1(6857.83,6260)
  Top Layer w30: R7_Row1.1@6264.72,6372.95 R6_Row1.2@6514.72,6372.95
  Bottom Layer w20: v1(6857.83,6260) 7197.83,6600 15024.26,6600 15410,6214.26 15410,5750 15560,5600 15910,5600 16210,5300 v1(16210,5210)
ROW1: R6_Row2.2 R7_Row2.1 U5.2 | length 9866.8
  Top Layer w15: U5.2@16010,4977.36 16010,5110 v1(16110,5210)
  Top Layer w20: R6_Row2.2@7813.94,6372.95 7944.09,6372.95 8057.04,6260 v1(8157.05,6260)
  Top Layer w30: R7_Row2.1@7563.94,6372.95 R6_Row2.2@7813.94,6372.95
  Bottom Layer w20: v1(8157.05,6260) 8447.04,6550 15003.55,6550 15350,6203.55 15350,5739.29 15539.29,5550 15860,5550 16110,5300 v1(16110,5210)
ROW2: R6_Row3.2 R7_Row3.1 U5.3 | length 8404.9
  Top Layer w15: U5.3@15960,4977.36 15960,5160 v1(16010,5210)
  Top Layer w20: R6_Row3.2@9113.15,6372.95 9243.3,6372.95 9356.25,6260 v1(9456.25,6260)
  Top Layer w30: R7_Row3.1@8863.15,6372.95 R6_Row3.2@9113.15,6372.95
  Bottom Layer w20: v1(9456.25,6260) 9695.13,6498.87 ; 9695.13,6500 14982.84,6500 15300,6182.84 15300,5718.58 15518.58,5500 15810,5500 16010,5300 v1(16010,5210)
ROW3: R6_Row4.2 R7_Row4.1 U5.4 | length 6944.1
  Top Layer w15: U5.4@15910,4977.36 v1(15910,5210)
  Top Layer w20: R6_Row4.2@10412.36,6372.95 10542.51,6372.95 10655.46,6260 v1(10755.46,6260)
  Top Layer w30: R7_Row4.1@10162.36,6372.95 R6_Row4.2@10412.36,6372.95
  Bottom Layer w20: v1(10755.46,6260) 10945.47,6450 14962.13,6450 15250,6162.13 15250,5697.87 15497.87,5450 15760,5450 15910,5300 v1(15910,5210)
ROW4: R6_Row5.2 R7_Row5.1 U5.5 | length 5525.1
  Top Layer w15: v1(15810,5210) 15860,5160 U5.5@15860,4977.36
  Top Layer w20: R6_Row5.2@11711.57,6372.95 11841.72,6372.95 11954.68,6260 v1(12054.68,6260)
  Top Layer w30: R7_Row5.1@11461.57,6372.95 R6_Row5.2@11711.57,6372.95
  Bottom Layer w20: v1(12054.68,6260) 12193.84,6399.16 ; 12193.84,6400 14941.42,6400 15200,6141.42 15200,5675 15475,5400 15710,5400 15810,5300 v1(15810,5210)
ROW5: R6_Row6.2 R7_Row6.1 U5.6 | length 4108.4
  Top Layer w15: v1(15710,5210) 15810,5110 U5.6@15810,4977.36
  Top Layer w20: R6_Row6.2@13010.79,6372.95 13140.94,6372.95 13253.89,6260 v1(13353.89,6260)
  Top Layer w30: R7_Row6.1@12760.79,6372.95 R6_Row6.2@13010.79,6372.95
  Bottom Layer w20: v1(13353.89,6260) 13443.26,6349.37 ; 13442.62,6350 14920.71,6350 15150,6120.71 15150,5650 15450,5350 15660,5350 15710,5300 v1(15710,5210)
ROW6: R6_Row7.2 R7_Row7.1 U5.7 | length 2670.8
  Top Layer w15: v1(15610,5210) 15760,5060 U5.7@15760,4977.36
  Top Layer w20: R6_Row7.2@14310,6372.95 14440.15,6372.95 14553.1,6260 v1(14653.1,6260)
  Top Layer w30: R7_Row7.1@14060,6372.95 R6_Row7.2@14310,6372.95
  Bottom Layer w20: v1(14653.1,6260) 14693.1,6300 14900,6300 15100,6100 15100,5628.75 15428.75,5300 15580,5300 15610,5270 v1(15610,5210)
RST: C2.1 P1.5 R4.1 S1.1 U2.4 | length 2240.6
  Top Layer w15: C2.1@16220.71,2410.55 16417.21,2410.55 16460.71,2367.05 S1.1@16460.71,2261.34 ; S1.1@16460.71,2267.05 16460.71,2182.05 16500.71,2142.05 16575.71,2142.05 16615.71,2182.05 16615.71,2227.05 16685.71,2297.05 16885.71,2297.05 17045.71,2457.05 17070.71,2457.05 17130.71,2517.05 17130.71,2599.05 17094.71,2635.05 16997.71,2635.05 16586.65,3046.1 U2.4@16474.25,3046.1
TCP_RESET: U2.13
USART1_RX: U2.11
USART1_TX: U2.12
VCC: C1.1 C4.1 C5.1 C6.1 C7.1 C9_REG1.1 C9_REG2.1 C9_REG3.1 C11.1 C13.1 C14.1 D2.2 D3.2 D4.2 D12.2 D14.2 D16.1 P1.2 R4.2 U1.8 U2.5 U2.17 U2.27 U2.38 U3_REG1.1 U3_REG1.7 U3_REG2.1 U3_REG2.7 U3_REG3.1 U3_REG3.7 U4.3 U5.16 | length 26806
  Top Layer w15: U3_REG2.7@7275.47,1400.47 7275.47,1330.99 7307.87,1298.58 7533.07,1298.58 7575.47,1340.99 U3_REG2.1@7575.47,1400.47 7639.45,1400.47 7650.47,1389.45 C9_REG2.1@7650.47,1337.48 ; U3_REG1.7@10740.04,1400.47 10740.04,1330.99 10772.44,1298.58 10997.64,1298.58 11040.04,1340.99 U3_REG1.1@11040.04,1400.47 11104.02,1400.47 11115.04,1389.45 C9_REG1.1@11115.04,1337.48 ; U3_REG3.7@14204.61,1400.47 14204.61,1330.98 14237.01,1298.58 14462.21,1298.58 14504.61,1340.98 U3_REG3.1@14504.61,1400.47 14568.58,1400.47 14579.61,1389.45 C9_REG3.1@14579.61,1337.48 ; 15305.71,3612.05 15645.71,3612.05 15734.21,3523.54 16133.21,3523.54 16194.71,3462.05 C7.1@16251.81,3462.05 U2.17@16251.81,3331.54 ; 15305.71,4397.05 15495.71,4397.05 15602.2,4290.55 15709.73,4290.55 15725.71,4306.54 U1.8@15775.71,4306.54 ; 15310.71,3397.05 15540.71,3397.05 15798.58,3139.17 C4.1@15897.64,3139.17 ; 15310.71,4875 16025,4875 16060,4840 U5.16@16060,4772.64 16122.64,4772.64 16145,4795 C14.1@16145,4843.5 ; D2.2@15655.71,3943.54 v1(15655.71,4092.05) ; v1@15660.71,4097.05 C1.1@15660.71,4290.55 ; C13.1@15660.71,6203.54 15732.2,6203.54 15805.71,6277.05 C11.1@15860.71,6277.05 ; D14.2@15765.71,5697.05 15765.71,5747.05 15810.71,5792.05 D16.1@15970.71,5792.05 ; D14.2@15765.71,5703.54 v1(15765.71,5827.05) ; C4.1@15897.64,3140.59 16112.16,3140.59 16220.71,3032.05 U2.38@16220.71,2886.65 ; D3.2@16150.71,3943.54 v1(16150.71,4092.05) ; C5.1@16220.31,2753.54 U2.38@16220.31,2886.65 ; C5.1@16220.71,2753.54 16274.21,2753.54 16310.71,2717.05 R4.2@16310.71,2475.51 16423.21,2475.51 16491.67,2407.05 16579.75,2407.05 16648.21,2475.51 P1.2@16760.71,2475.51 ; U2.17@16251.26,3337.05 16251.26,3236.5 16410.71,3077.05 U2.5@16480.71,3077.05 ; U2.5@16474.25,3077.6 16620.16,3077.6 16797.2,2900.55 C6.1@16970.71,2900.55
  Top Layer w25: C9_REG2.1@7650.47,1337.48 7721.97,1337.48 7750.47,1365.99 7750.47,1421.31 7874.75,1545.58 8077.87,1545.58 ; 8077.87,1547 8224.27,1693.41 8224.27,2133 ; C9_REG1.1@11115.04,1337.48 11186.54,1337.48 11215.04,1365.99 11215.04,1421.31 11339.31,1545.58 11542.43,1545.58 ; 11542.43,1547 11688.84,1693.41 11688.84,2133 ; C9_REG3.1@14579.61,1337.48 14651.1,1337.48 14679.61,1365.98 14679.61,1421.31 14803.88,1545.58 15007,1545.58 ; 15007,1547 15153.41,1693.41 15153.41,2133
  Top Layer w50: v1(15204,2130) 15305.71,2231.71 15305.71,6617.05 15390.71,6702.05 15980.71,6702.05 16120.71,6562.05 U4.3@16120.71,6342.05 ; D16.1@15965.71,5787.05 15965.71,6157.05 15945.71,6177.05 15900.71,6177.05 15860.71,6217.05 C11.1@15860.71,6282.05 15911.81,6282.05 15961.26,6331.5 U4.3@16120.55,6331.5 ; D16.1@15970.71,5782.05 15970.71,5727.05 16015.71,5682.05 16335.71,5682.05 D12.2@16415.71,5602.05
  Bottom Layer w15: v1(15655.71,4092.05) 15715.71,4157.05 16100.71,4157.05 16150.71,4107.05 v1(16150.71,4092.05)
  Bottom Layer w50: v1(8174.87,2130) v1(15104,2130)
  other v1: 8274.87,2130 11639.43,2130 11739.43,2130
pads on no net: J1_BUS2.3 J1_BUS2.5 J1_BUS2.MH1 J1_BUS2.MH2 J1_BUS3.3 J1_BUS3.5 J1_BUS3.MH1 J1_BUS3.MH2 U2.15 U2.16 U2.19 U2.20 U2.21 U2.23 U2.24 U2.25 U2.26 U2.29 U2.34 U2.35 U2.36 U2.40 U2.41 U2.42 U2.43 U2.44

## Polygon pours and split planes (outlines as drawn)
GND on Top Layer "Top Layer-No Net" (solid): 17890,7840 17890,730 4340,730 4340,1850 14910,1850 15310,2250 15310,7840
OUT_Row1 on Top Layer "Top Layer-No Net" (solid, pour order 1000): 5984.83,2509.42 5959.83,2484.42 5959.83,2434.42 5984.83,2409.42 6134.83,2409.42 6159.83,2434.42 6159.83,2484.42 6134.83,2509.42
OUT_Row1 on Top Layer "Top Layer-No Net" (solid, pour order 1000): 6059.72,2564.42 6061.72,2564.42 6163.72,2462.42 5955.72,2462.42
OUT_Row2 on Top Layer "Top Layer-No Net" (solid, pour order 1000): 7284.04,3099.97 7259.04,3074.97 7259.04,3024.97 7284.04,2999.97 7434.04,2999.97 7459.04,3024.97 7459.04,3074.97 7434.04,3099.97
OUT_Row2 on Top Layer "Top Layer-No Net" (solid, pour order 1000): 7358.94,3154.97 7360.94,3154.97 7462.94,3052.97 7254.94,3052.97
OUT_Row3 on Top Layer "Top Layer-No Net" (solid, pour order 1000): 8583.25,3690.52 8558.25,3665.52 8558.25,3615.52 8583.25,3590.52 8733.25,3590.52 8758.25,3615.52 8758.25,3665.52 8733.25,3690.52
OUT_Row3 on Top Layer "Top Layer-No Net" (solid, pour order 1000): 8658.15,3745.52 8660.15,3745.52 8762.15,3643.52 8554.15,3643.52
OUT_Row4 on Top Layer "Top Layer-No Net" (solid, pour order 1000): 9882.46,4281.07 9857.46,4256.07 9857.46,4206.07 9882.46,4181.07 10032.46,4181.07 10057.46,4206.07 10057.46,4256.07 10032.46,4281.07
OUT_Row4 on Top Layer "Top Layer-No Net" (solid, pour order 1000): 9957.36,4336.07 9959.36,4336.07 10061.36,4234.07 9853.36,4234.07
OUT_Row5 on Top Layer "Top Layer-No Net" (solid, pour order 1000): 11181.68,4871.62 11156.68,4846.62 11156.68,4796.62 11181.68,4771.62 11331.68,4771.62 11356.68,4796.62 11356.68,4846.62 11331.68,4871.62
OUT_Row5 on Top Layer "Top Layer-No Net" (solid, pour order 1000): 11256.57,4926.62 11258.57,4926.62 11360.57,4824.62 11152.57,4824.62
OUT_Row6 on Top Layer "Top Layer-No Net" (solid, pour order 1000): 12480.89,5462.17 12455.89,5437.17 12455.89,5387.17 12480.89,5362.17 12630.89,5362.17 12655.89,5387.17 12655.89,5437.17 12630.89,5462.17
OUT_Row6 on Top Layer "Top Layer-No Net" (solid, pour order 1000): 12555.79,5517.17 12557.79,5517.17 12659.79,5415.17 12451.79,5415.17
EXTSUPP_Row1 on Top Layer "Top Layer-No Net" (solid, pour order 1000): 6515.99,6808.12 6513.99,6808.12 6411.99,6910.12 6619.99,6910.12
EXTSUPP_Row1 on Top Layer "Top Layer-No Net" (solid, pour order 1000): 7174.21,6807.12 7172.21,6807.12 7070.21,6909.12 7278.21,6909.12
EXTSUPP_Row1 on Top Layer "Top Layer-No Net" (solid, pour order 1000): 7815.21,6808.12 7813.21,6808.12 7711.21,6910.12 7919.21,6910.12
EXTSUPP_Row1 on Top Layer "Top Layer-No Net" (solid, pour order 1000): 8473.42,6807.12 8471.42,6807.12 8369.42,6909.12 8577.42,6909.12
EXTSUPP_Row1 on Top Layer "Top Layer-No Net" (solid, pour order 1000): 9114.42,6808.12 9112.42,6808.12 9010.42,6910.12 9218.42,6910.12
EXTSUPP_Row1 on Top Layer "Top Layer-No Net" (solid, pour order 1000): 9772.63,6807.12 9770.63,6807.12 9668.63,6909.12 9876.63,6909.12
EXTSUPP_Row1 on Top Layer "Top Layer-No Net" (solid, pour order 1000): 10413.63,6808.12 10411.63,6808.12 10309.63,6910.12 10517.63,6910.12
EXTSUPP_Row1 on Top Layer "Top Layer-No Net" (solid, pour order 1000): 11071.84,6807.12 11069.84,6807.12 10967.84,6909.12 11175.84,6909.12
EXTSUPP_Row1 on Top Layer "Top Layer-No Net" (solid, pour order 1000): 11712.84,6808.12 11710.84,6808.12 11608.84,6910.12 11816.84,6910.12
EXTSUPP_Row1 on Top Layer "Top Layer-No Net" (solid, pour order 1000): 12371.06,6807.12 12369.06,6807.12 12267.06,6909.12 12475.06,6909.12
EXTSUPP_Row1 on Top Layer "Top Layer-No Net" (solid, pour order 1000): 13012.06,6808.12 13010.06,6808.12 12908.06,6910.12 13116.06,6910.12
VCC on Top Layer "Top Layer-No Net" (solid, pour order 1007): 8299.87,2080 8324.87,2105 8324.87,2155 8299.87,2180 8149.87,2180 8124.87,2155 8124.87,2105 8149.87,2080
VCC on Top Layer "Top Layer-No Net" (solid, pour order 1000): 8226.27,2031 8224.27,2031 8122.27,2133 8330.27,2133
VCC on Top Layer "Top Layer-No Net" (solid, pour order 1007): 11764.43,2080 11789.43,2105 11789.43,2155 11764.43,2180 11614.43,2180 11589.43,2155 11589.43,2105 11614.43,2080
VCC on Top Layer "Top Layer-No Net" (solid, pour order 1000): 11690.84,2031 11688.84,2031 11586.84,2133 11794.84,2133
RES18 on Top Layer "Top Layer-No Net" (solid, pour order 1000): 4922.76,2852.06 4922.76,2854.06 5024.76,2956.06 5024.76,2748.06
RES18 on Top Layer "Top Layer-No Net" (solid, pour order 1000): 4922.76,5214.27 4922.76,5216.27 5024.76,5318.27 5024.76,5110.27
RES18 on Top Layer "Top Layer-No Net" (solid, pour order 1000): 4922.76,4623.72 4922.76,4625.72 5024.76,4727.72 5024.76,4519.72
RES18 on Top Layer "Top Layer-No Net" (solid, pour order 1000): 4922.76,4033.16 4922.76,4035.16 5024.76,4137.16 5024.76,3929.16
RES18 on Top Layer "Top Layer-No Net" (solid, pour order 1000): 4922.76,3442.61 4922.76,3444.61 5024.76,3546.61 5024.76,3338.61
RES18 on Top Layer "Top Layer-No Net" (solid, pour order 1000): 4922.76,2261.51 4922.76,2263.51 5024.76,2365.51 5024.76,2157.51
RES17 on Top Layer "Top Layer-No Net" (solid, pour order 1000): 5355.83,2852.06 5355.83,2854.06 5457.83,2956.06 5457.83,2748.06
RES17 on Top Layer "Top Layer-No Net" (solid, pour order 1000): 5355.83,5214.27 5355.83,5216.27 5457.83,5318.27 5457.83,5110.27
RES17 on Top Layer "Top Layer-No Net" (solid, pour order 1000): 5355.83,4623.72 5355.83,4625.72 5457.83,4727.72 5457.83,4519.72
RES17 on Top Layer "Top Layer-No Net" (solid, pour order 1000): 5355.83,4033.16 5355.83,4035.16 5457.83,4137.16 5457.83,3929.16
RES17 on Top Layer "Top Layer-No Net" (solid, pour order 1000): 5355.83,3442.61 5355.83,3444.61 5457.83,3546.61 5457.83,3338.61
RES17 on Top Layer "Top Layer-No Net" (solid, pour order 1000): 5355.83,2261.51 5355.83,2263.51 5457.83,2365.51 5457.83,2157.51
RES16 on Top Layer "Top Layer-No Net" (solid, pour order 1000): 5788.9,2852.06 5788.9,2854.06 5890.9,2956.06 5890.9,2748.06
RES16 on Top Layer "Top Layer-No Net" (solid, pour order 1000): 5788.9,5214.27 5788.9,5216.27 5890.9,5318.27 5890.9,5110.27
RES16 on Top Layer "Top Layer-No Net" (solid, pour order 1000): 5788.9,4623.72 5788.9,4625.72 5890.9,4727.72 5890.9,4519.72
RES16 on Top Layer "Top Layer-No Net" (solid, pour order 1000): 5788.9,4033.16 5788.9,4035.16 5890.9,4137.16 5890.9,3929.16
RES16 on Top Layer "Top Layer-No Net" (solid, pour order 1000): 5788.9,3442.61 5788.9,3444.61 5890.9,3546.61 5890.9,3338.61
RES16 on Top Layer "Top Layer-No Net" (solid, pour order 1000): 5788.9,2261.51 5788.9,2263.51 5890.9,2365.51 5890.9,2157.51
RES15 on Top Layer "Top Layer-No Net" (solid, pour order 1000): 6221.97,2852.06 6221.97,2854.06 6323.97,2956.06 6323.97,2748.06
RES15 on Top Layer "Top Layer-No Net" (solid, pour order 1000): 6221.97,5214.27 6221.97,5216.27 6323.97,5318.27 6323.97,5110.27
RES15 on Top Layer "Top Layer-No Net" (solid, pour order 1000): 6221.97,4623.72 6221.97,4625.72 6323.97,4727.72 6323.97,4519.72
RES15 on Top Layer "Top Layer-No Net" (solid, pour order 1000): 6221.97,4033.16 6221.97,4035.16 6323.97,4137.16 6323.97,3929.16
RES15 on Top Layer "Top Layer-No Net" (solid, pour order 1000): 6221.97,3442.61 6221.97,3444.61 6323.97,3546.61 6323.97,3338.61
RES15 on Top Layer "Top Layer-No Net" (solid, pour order 1000): 6221.97,2261.51 6221.97,2263.51 6323.97,2365.51 6323.97,2157.51
RES14 on Top Layer "Top Layer-No Net" (solid, pour order 1000): 6655.04,2852.06 6655.04,2854.06 6757.04,2956.06 6757.04,2748.06
RES14 on Top Layer "Top Layer-No Net" (solid, pour order 1000): 6655.04,5214.27 6655.04,5216.27 6757.04,5318.27 6757.04,5110.27
RES14 on Top Layer "Top Layer-No Net" (solid, pour order 1000): 6655.04,4623.72 6655.04,4625.72 6757.04,4727.72 6757.04,4519.72
RES14 on Top Layer "Top Layer-No Net" (solid, pour order 1000): 6655.04,4033.16 6655.04,4035.16 6757.04,4137.16 6757.04,3929.16
RES14 on Top Layer "Top Layer-No Net" (solid, pour order 1000): 6655.04,3442.61 6655.04,3444.61 6757.04,3546.61 6757.04,3338.61
RES14 on Top Layer "Top Layer-No Net" (solid, pour order 1000): 6655.04,2261.51 6655.04,2263.51 6757.04,2365.51 6757.04,2157.51
RES13 on Top Layer "Top Layer-No Net" (solid, pour order 1000): 7088.11,2852.06 7088.11,2854.06 7190.11,2956.06 7190.11,2748.06
RES13 on Top Layer "Top Layer-No Net" (solid, pour order 1000): 7088.11,5214.27 7088.11,5216.27 7190.11,5318.27 7190.11,5110.27
RES13 on Top Layer "Top Layer-No Net" (solid, pour order 1000): 7088.11,4623.72 7088.11,4625.72 7190.11,4727.72 7190.11,4519.72
RES13 on Top Layer "Top Layer-No Net" (solid, pour order 1000): 7088.11,4033.16 7088.11,4035.16 7190.11,4137.16 7190.11,3929.16
RES13 on Top Layer "Top Layer-No Net" (solid, pour order 1000): 7088.11,3442.61 7088.11,3444.61 7190.11,3546.61 7190.11,3338.61
RES13 on Top Layer "Top Layer-No Net" (solid, pour order 1000): 7088.11,2261.51 7088.11,2263.51 7190.11,2365.51 7190.11,2157.51
RES12 on Top Layer "Top Layer-No Net" (solid, pour order 1000): 7521.18,2852.06 7521.18,2854.06 7623.18,2956.06 7623.18,2748.06
RES12 on Top Layer "Top Layer-No Net" (solid, pour order 1000): 7521.18,5214.27 7521.18,5216.27 7623.18,5318.27 7623.18,5110.27
RES12 on Top Layer "Top Layer-No Net" (solid, pour order 1000): 7521.18,4623.72 7521.18,4625.72 7623.18,4727.72 7623.18,4519.72
RES12 on Top Layer "Top Layer-No Net" (solid, pour order 1000): 7521.18,4033.16 7521.18,4035.16 7623.18,4137.16 7623.18,3929.16
RES12 on Top Layer "Top Layer-No Net" (solid, pour order 1000): 7521.18,3442.61 7521.18,3444.61 7623.18,3546.61 7623.18,3338.61
RES12 on Top Layer "Top Layer-No Net" (solid, pour order 1000): 7521.18,2261.51 7521.18,2263.51 7623.18,2365.51 7623.18,2157.51
RES11 on Top Layer "Top Layer-No Net" (solid, pour order 1000): 7954.26,2852.06 7954.26,2854.06 8056.26,2956.06 8056.26,2748.06
RES11 on Top Layer "Top Layer-No Net" (solid, pour order 1000): 7954.26,5214.27 7954.26,5216.27 8056.26,5318.27 8056.26,5110.27
RES11 on Top Layer "Top Layer-No Net" (solid, pour order 1000): 7954.26,4623.72 7954.26,4625.72 8056.26,4727.72 8056.26,4519.72
RES11 on Top Layer "Top Layer-No Net" (solid, pour order 1000): 7954.26,4033.16 7954.26,4035.16 8056.26,4137.16 8056.26,3929.16
RES11 on Top Layer "Top Layer-No Net" (solid, pour order 1000): 7954.26,3442.61 7954.26,3444.61 8056.26,3546.61 8056.26,3338.61
RES11 on Top Layer "Top Layer-No Net" (solid, pour order 1000): 7954.26,2261.51 7954.26,2263.51 8056.26,2365.51 8056.26,2157.51
RES28 on Top Layer "Top Layer-No Net" (solid, pour order 1000): 8387.33,2852.06 8387.33,2854.06 8489.33,2956.06 8489.33,2748.06
RES28 on Top Layer "Top Layer-No Net" (solid, pour order 1000): 8387.33,5214.27 8387.33,5216.27 8489.33,5318.27 8489.33,5110.27
RES28 on Top Layer "Top Layer-No Net" (solid, pour order 1000): 8387.33,4623.72 8387.33,4625.72 8489.33,4727.72 8489.33,4519.72
RES28 on Top Layer "Top Layer-No Net" (solid, pour order 1000): 8387.33,4033.16 8387.33,4035.16 8489.33,4137.16 8489.33,3929.16
RES28 on Top Layer "Top Layer-No Net" (solid, pour order 1000): 8387.33,3442.61 8387.33,3444.61 8489.33,3546.61 8489.33,3338.61